# EAGLE board Fantastic Turing (EAGLE 9.7.0)

Size 271.02 x 100.29 mm. Coordinates in mm from the lower left corner, seen from the top.
Outline: 0,0 271.02,0 271.02,100.29 0,100.29 0,0
Copper layers (1*16): Top 0.035mm / dielectric 1.5mm / Bottom 0.035mm
Design rules "default": minimum track width 6mil, minimum drill 0.35mm, track to track 6mil, track to pad 6mil, pad to pad 6mil, via to via 6mil, smd to smd 6mil, copper to edge 40mil, drill to drill 6mil, minimum pad ring 10mil, minimum via ring 8mil, stop-mask expansion 4mil, vias tented up to drill 0mil, thermal gap 10mil

## Footprints (pad centres in the part's own frame; a part is rotated, then mirrored left to right if it is on the bottom)
LEDRD254W60D565H860B = drill 0.981 pad 1.581: 1 -1.27,0; 2 1.27,0
LEDRD254W60D565H860B_B = drill 0.981 pad 1.581: 1 -1.27,0; 2 1.27,0
LEDRD254W60D565H860B_G = drill 0.981 pad 1.581: 1 -1.27,0; 2 1.27,0
LEDRD254W60D565H860B_W = drill 0.981 pad 1.581: 1 -1.27,0; 2 1.27,0
RESAD1016W63L850D250B = drill 0.83 pad 1.43: 1 -5.08,0; 2 5.08,0
HA-06-SM065 = drill 1 pad 1.676: 1 -2.54,-2.54; 2 0,2.54; 3 2.54,-2.54
SWITCH-MOMENTARY-PTH-6.5MM = drill 1.016 pad 1.88: 1 -3.251,2.261; 2 3.251,2.261; 3 -3.251,-2.261; 4 3.251,-2.261
JHD-162A = drill 1.016 long: 1 -19.05,0; 2 -16.51,0; 3 -13.97,0; 4 -11.43,0; 5 -8.89,0; 6 -6.35,0; 7 -3.81,0; 8 -1.27,0; 9 1.27,0; 10 3.81,0; 11 6.35,0; 12 8.89,0; 13 11.43,0; 14 13.97,0; 15 16.51,0; 16 19.05,0
ARDUINO-UNO-R3-SHIELD = drill 1.016 pad 1.88: 3.3V 24.13,-2.54; 5V 24.13,0; A0 24.13,12.7; A1 24.13,15.24; A2 24.13,17.78; A3 24.13,20.32; A4 24.13,22.86; A5 24.13,25.4; AREF -24.13,-13.97; D2 -24.13,20.32; D3 -24.13,17.78; D4 -24.13,15.24; D5 -24.13,12.7; D6 -24.13,10.16; D7 -24.13,7.62; D8 -24.13,3.81; D9 -24.13,1.27; D10 -24.13,-1.27; D11 -24.13,-3.81; D12 -24.13,-6.35; D13 -24.13,-8.89; GND@0 24.13,2.54; GND@1 24.13,5.08; GND@2 -24.13,-11.43; IOREF 24.13,-7.62; NC 24.13,-10.16; RES 24.13,-5.08; RX -24.13,25.4; SCL -24.13,-19.05; SDA -24.13,-16.51; TX -24.13,22.86; VIN 24.13,7.62

## Placement (x,y rotation side)
D1  RED  [LEDRD254W60D565H860B]  254.53,84.13 90 top
D2  BLUE  [LEDRD254W60D565H860B_B]  254.53,66.35 90 top
D3  GREEN  [LEDRD254W60D565H860B_G]  254.53,48.57 90 top
D4  WHITE  [LEDRD254W60D565H860B_W]  254.53,30.79 90 top
R2  220  [RESAD1016W63L850D250B]  249.45,85.4 0 top
R3  220  [RESAD1016W63L850D250B]  249.45,67.62 0 top
R4  220  [RESAD1016W63L850D250B]  249.45,49.84 0 top
R6  200  [RESAD1016W63L850D250B]  249.45,32.06 0 top
R7  10k  [RESAD1016W63L850D250B]  264.69,85.4 270 top
R8  10k  [RESAD1016W63L850D250B]  264.69,67.62 270 top
R9  10k  [RESAD1016W63L850D250B]  264.69,49.84 270 top
R10  10k  [RESAD1016W63L850D250B]  264.69,32.06 270 top
R11  220  [RESAD1016W63L850D250B]  66.98,39.12 0 top
R12  10k  [RESAD1016W63L850D250B]  69.52,16.26 0 top
RPOT1  250k  [HA-06-SM065]  46.66,84.84 270 top
RPOT2  250k  [HA-06-SM065]  54.28,28.96 90 top
S1  SWITCH_MOMENTARY  [SWITCH-MOMENTARY-PTH-6.5MM]  258.34,77.78 0 top
S2  SWITCH_MOMENTARY  [SWITCH-MOMENTARY-PTH-6.5MM]  258.34,60 0 top
S3  SWITCH_MOMENTARY  [SWITCH-MOMENTARY-PTH-6.5MM]  258.34,42.22 0 top
S4  SWITCH_MOMENTARY  [SWITCH-MOMENTARY-PTH-6.5MM]  258.34,24.44 0 top
S7  SWITCH_MOMENTARY  [SWITCH-MOMENTARY-PTH-6.5MM]  50.47,18.8 0 top
U3  LCD-16X2JHD-162A  [JHD-162A]  36.63,55.63 270 top
UARDUINO_1  ARDUINO-UNO-R3-SHIELD  [ARDUINO-UNO-R3-SHIELD]  192.04,52.4 180 top
UARDUINO_2  ARDUINO-UNO-R3-SHIELD  [ARDUINO-UNO-R3-SHIELD]  123.85,50.82 180 top

## Library data of the parts
D1 = Tinkercad; CATEGORY: Opto-Electronic; SUB-CATEGORY: LED; VALUE: LED_RED
D2 = Tinkercad; CATEGORY: Opto-Electronic; SUB-CATEGORY: LED; VALUE: LED_BLUE
D3 = Tinkercad; CATEGORY: Opto-Electronic; SUB-CATEGORY: LED; VALUE: LED_GREEN
D4 = Tinkercad; CATEGORY: Opto-Electronic; SUB-CATEGORY: LED; VALUE: LED_WHITE
R2-R4 R6-R12 RPOT1 RPOT2 S1-S4 S7 U3 UARDUINO_1 UARDUINO_2 = Tinkercad

## Nets
U3_LED+: R11.1 U3.15
U3_VO: RPOT1.2 U3.3
UARDUINO_1_5V: S1.3 S1.4 S2.3 S2.4 S3.3 S3.4 S4.3 S4.4 UARDUINO_1.5V
UARDUINO_1_D3: R10.2 S4.1 S4.2 UARDUINO_1.D3
UARDUINO_1_D4: D4.1 UARDUINO_1.D4
UARDUINO_1_D6: R9.2 S3.1 S3.2 UARDUINO_1.D6
UARDUINO_1_D9: R8.2 S2.1 S2.2 UARDUINO_1.D9
UARDUINO_1_D10: D2.1 UARDUINO_1.D10
UARDUINO_1_D12: R7.2 S1.1 S1.2 UARDUINO_1.D12
UARDUINO_1_D13: D1.1 UARDUINO_1.D13
UARDUINO_1_GND: D1.2 D2.2 D3.2 D4.2 R2.1 R2.2 R3.1 R3.2 R4.1 R4.2 R6.1 R6.2 R7.1 R8.1 R9.1 R10.1 R12.2 RPOT1.3 RPOT2.3 U3.1 U3.5 U3.16 UARDUINO_1.GND@0 UARDUINO_1.GND@1 UARDUINO_1.GND@2 UARDUINO_2.GND@0 UARDUINO_2.GND@1 UARDUINO_2.GND@2
UARDUINO_1_RX: UARDUINO_1.RX UARDUINO_2.TX
UARDUINO_2_5V: R11.2 RPOT1.1 RPOT2.1 S7.1 S7.2 U3.2 UARDUINO_2.5V
UARDUINO_2_A5: RPOT2.2 UARDUINO_2.A5
UARDUINO_2_D2: U3.14 UARDUINO_2.D2
UARDUINO_2_D3: U3.13 UARDUINO_2.D3
UARDUINO_2_D4: U3.12 UARDUINO_2.D4
UARDUINO_2_D5: U3.11 UARDUINO_2.D5
UARDUINO_2_D7: R12.1 S7.3 S7.4 UARDUINO_2.D7
UARDUINO_2_D11: U3.6 UARDUINO_2.D11
UARDUINO_2_D12: U3.4 UARDUINO_2.D12
UARDUINO_2_RX: UARDUINO_1.TX UARDUINO_2.RX

## Tracks (layer width: path | path; a pad name or v marks a point on that pad's centre or on a via)
U3_LED+  (1 unrouted)
U3_VO  (1 unrouted)
UARDUINO_1_5V  (8 unrouted)
UARDUINO_1_D3  (3 unrouted)
UARDUINO_1_D4  (1 unrouted)
UARDUINO_1_D6  (3 unrouted)
UARDUINO_1_D9  (3 unrouted)
UARDUINO_1_D10  (1 unrouted)
UARDUINO_1_D12  (3 unrouted)
UARDUINO_1_D13  (1 unrouted)
UARDUINO_1_GND  (27 unrouted)
UARDUINO_1_RX  (1 unrouted)
UARDUINO_2_5V  (6 unrouted)
UARDUINO_2_A5  (1 unrouted)
UARDUINO_2_D2  (1 unrouted)
UARDUINO_2_D3  (1 unrouted)
UARDUINO_2_D4  (1 unrouted)
UARDUINO_2_D5  (1 unrouted)
UARDUINO_2_D7  (3 unrouted)
UARDUINO_2_D11  (1 unrouted)
UARDUINO_2_D12  (1 unrouted)
UARDUINO_2_RX  (1 unrouted)